# Allegro board D1.brd
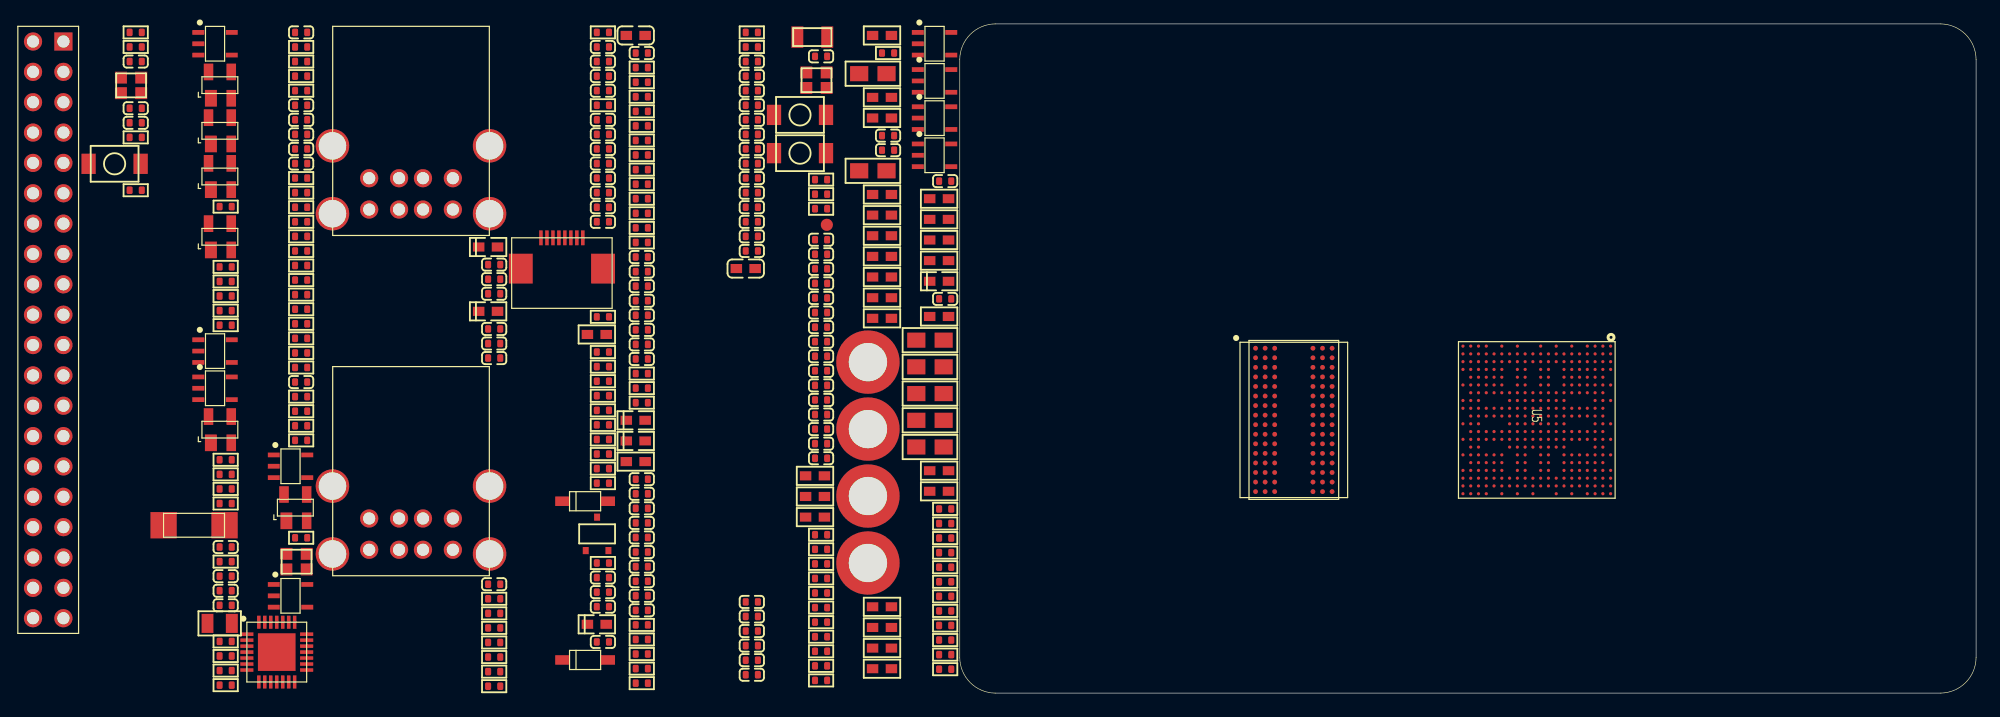
[diagram p0: board, top side]
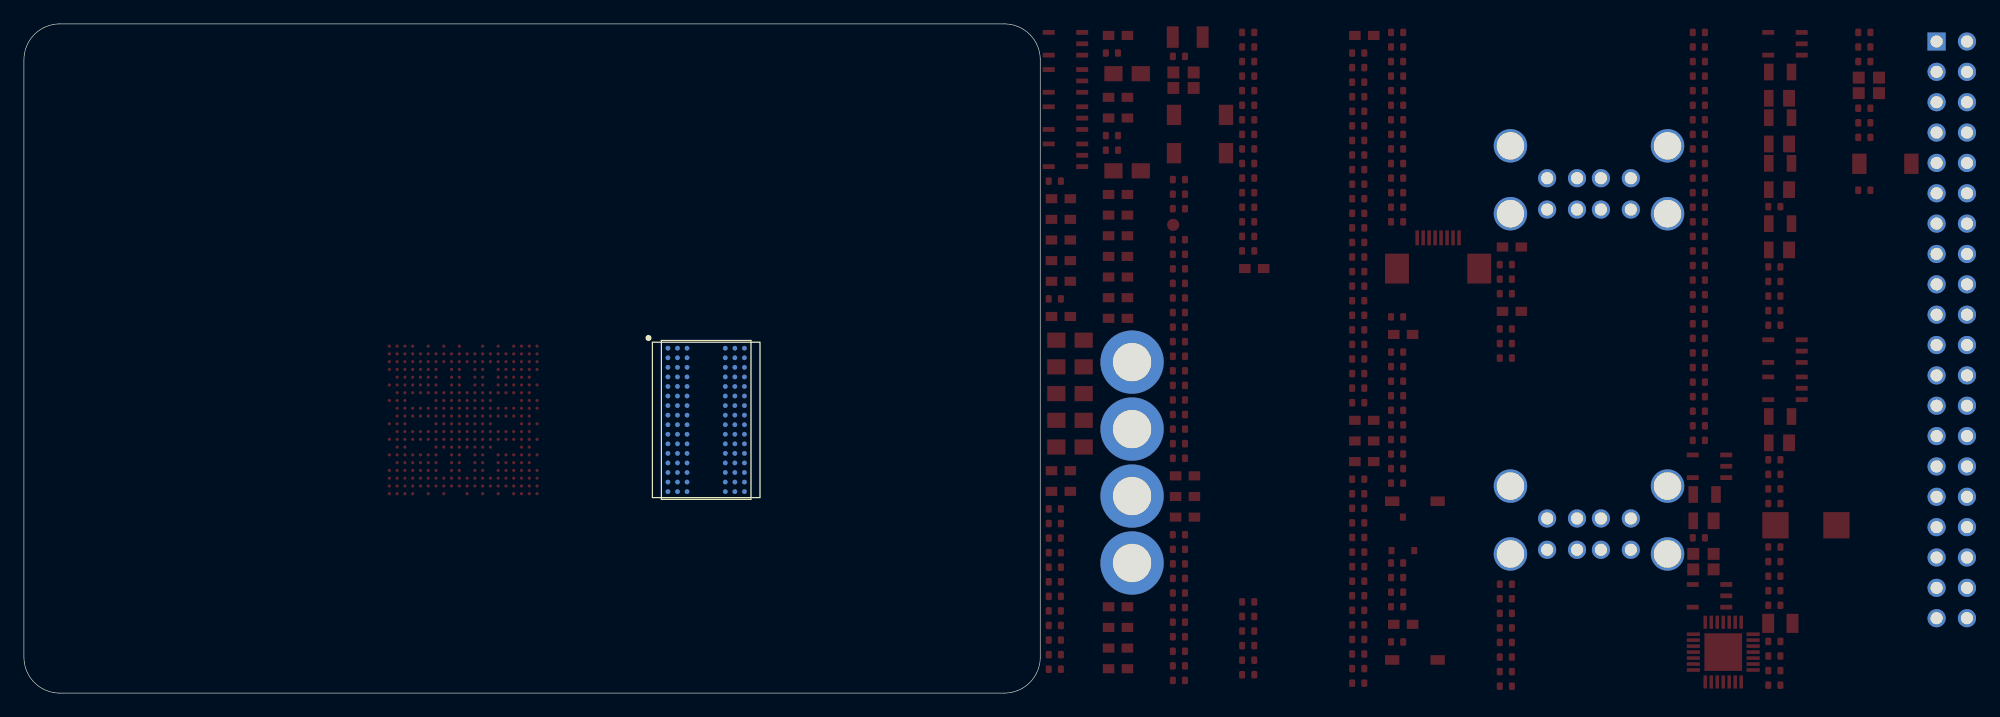
[diagram p1: board, bottom side, seen from below]

Outline 85 x 56 mm; copper layers: TOP, BOTTOM. Coordinates in mm from the lower left corner of the outline.
Outline path: 0,53 0,3 arc(0.88,0.88) 3,0 82,0 arc(84.12,0.88) 85,3 85,53 arc(84.12,55.12) 82,56 3,56 arc(0.88,55.12) 0,53

## Design rules (mm)
constraint set DEFAULT: min track width 0.127

## Placement (name value [footprint] x y rotation side)
C1  10uf  [R0603]  -6.5 31.36 0 top
C2  0.1uf  [C0402]  -5.99 46.65 0 top
C3  22uf  [R0603]  -1.73 37.92 0 top
C4  10uf  [R0603]  -6.5 40 0 top
C5  10uf  [R0603]  -6.5 48.13 0 top
C6  10uf  [R0603]  -6.5 49.85 0 top
C7  0.1uf  [C0402]  -1.22 42.84 0 top
C8  22uf  [R0603]  -1.73 36.19 0 top
C9  10uf  [R0603]  -1.73 31.52 0 top
C10  10uf  [R0603]  -6.5 33.09 0 top
C11  0.1uf  [C0402]  -1.22 32.99 0 top
C12  22uf  [R0603]  -1.73 41.37 0 top
C13  10uf  [R0603]  -6.5 34.82 0 top
C14  10uf  [R0603]  -6.5 36.54 0 top
C15  0.1uf  [C0402]  -5.99 45.43 0 top
C16  22uf  [R0603]  -1.73 39.64 0 top
C17  10uf  [R0603]  -6.5 38.27 0 top
C18  12pf  [C0402]  -11.6 34.28 0 top
C19  12pf  [C0402]  -11.6 35.5 0 top
C20  12pf  [C0402]  -11.6 36.72 0 top
C21  1uf  [C0402]  -11.6 53.28 0 top
C22  12pf  [C0402]  -11.6 37.94 0 top
C23  10uf  [R0603]  -6.5 2.04 0 top
C24  10uf  [R0603]  -6.5 7.22 0 top
C25  1uf  [C0402]  -11.6 26.97 0 top
C26  10uf  [R0603]  -6.5 5.49 0 top
C27  1uf  [C0402]  -11.6 25.75 0 top
C28  1uf  [C0402]  -11.6 24.53 0 top
C29  0.1uf  [C0402]  -11.6 29.41 0 top
C30  10uf  [R0603]  -6.5 3.77 0 top
C31  1uf  [C0402]  -11.6 23.31 0 top
C32  1uf  [C0402]  -11.6 22.09 0 top
C33  1uf  [C0402]  -11.6 20.87 0 top
C34  0.1uf  [C0402]  -11.6 28.19 0 top
C35  1uf  [C0402]  -11.6 19.65 0 top
C36  1uf  [C0402]  -11.6 30.63 0 top
C37  1uf  [C0402]  -11.6 31.85 0 top
C38  1uf  [C0402]  -11.6 33.06 0 top
C39  0.1uf  [C0402]  -17.39 52.85 0 top
C40  0.1uf  [C0402]  -17.39 51.63 0 top
C41  10uf  [R0603]  -12.11 16.45 0 top
C42  1uf  [C0402]  -17.39 7.63 0 top
C43  0.1uf  [C0402]  -17.39 50.41 0 top
C44  0.1uf  [C0402]  -17.39 49.19 0 top
C45  0.1uf  [C0402]  -17.39 47.97 0 top
C46  0.1uf  [C0402]  -17.39 46.75 0 top
C47  0.1uf  [C0402]  -17.39 45.54 0 top
C48  0.1uf  [C0402]  -17.39 44.32 0 top
C49  22uf  [C0603]  -27.1 55.03 0 top
C50  10uf  [R0603]  -12.11 18.18 0 top
C51  1uf  [C0402]  -17.39 6.41 0 top
C52  1uf  [C0402]  -17.39 5.19 0 top
C53  1uf  [C0402]  -17.39 3.97 0 top
C54  0.1uf  [C0402]  -17.39 43.1 0 top
C55  0.1uf  [C0402]  -17.39 41.88 0 top
C56  0.1uf  [C0402]  -17.39 40.66 0 top
C57  22uf  [C0603]  -17.9 35.53 0 top
C58  10uf  [R0603]  -12.11 14.73 0 top
C59  1uf  [C0402]  -17.39 2.76 0 top
C60  1uf  [C0402]  -17.39 1.54 0 top
C61  1uf  [C0402]  -26.59 53.56 0 top
C62  0.1uf  [C0402]  -17.39 39.44 0 top
C63  0.1uf  [C0402]  -17.39 38.22 0 top
C64  0.1uf  [C0402]  -17.39 37 0 top
C65  0.1uf  [C0402]  -26.59 36.49 0 top
C66  0.1uf  [C0402]  -26.59 35.27 0 top
C67  0.1uf  [C0402]  -26.59 34.05 0 top
C68  0.1uf  [C0402]  -26.59 32.84 0 top
C69  0.1uf  [C0402]  -26.59 31.62 0 top
C70  0.1uf  [C0402]  -26.59 30.4 0 top
C71  0.1uf  [C0402]  -26.59 29.18 0 top
C72  0.1uf  [C0402]  -26.59 27.96 0 top
C73  0.1uf  [C0402]  -26.59 17.9 0 top
C74  1uf  [C0402]  -29.85 54.07 0 top
C75  10uf  [R0603]  -27.1 19.37 0 top
C76  1uf  [C0402]  -29.85 52.85 0 top
C77  0.1uf  [C0402]  -26.59 16.68 0 top
C78  0.1uf  [C0402]  -26.59 15.46 0 top
C79  33p  [C0402]  -29.85 50.41 0 top
C80  0.1uf  [C0402]  -26.59 14.24 0 top
C81  0.1uf  [C0402]  -26.59 13.02 0 top
C82  1uf  [C0402]  -29.85 51.63 0 top
C83  0.1uf  [C0402]  -26.59 11.8 0 top
C84  0.1uf  [C0402]  -26.59 10.58 0 top
C85  0.1uf  [C0402]  -26.59 9.37 0 top
C86  0.1uf  [C0402]  -26.59 8.15 0 top
C87  0.1uf  [C0402]  -26.59 6.93 0 top
C88  0.1uf  [C0402]  -29.85 46.75 0 top
C89  1uf  [C0402]  -29.85 45.54 0 top
C90  1uf  [C0402]  -29.85 44.32 0 top
C91  1uf  [C0402]  -29.85 43.1 0 top
C92  0.1uf  [C0402]  -29.85 47.97 0 top
C93  1uf  [C0402]  -29.85 41.88 0 top
C94  1uf  [C0402]  -29.85 40.66 0 top
C95  1uf  [C0402]  -29.85 39.44 0 top
C96  0.1uf  [C0402]  -55.08 26.03 0 top
C97  0.1uf  [C0402]  -55.08 44.32 0 top
C98  18pf  [C0402]  -38.94 29.25 0 top
C99  18pf  [C0402]  -38.94 28.04 0 top
C100  0.1uf  [C0402]  -38.94 30.47 0 top
C101  0.1uf  [C0402]  -55.08 47.97 0 top
C102  0.1uf  [C0402]  -29.85 7.23 0 top
C103  1uf  [C0402]  -38.94 34.64 0 top
C104  0.1uf  [C0402]  -29.85 8.45 0 top
C105  0.1uf  [C0402]  -29.85 4.28 0 top
C106  0.1uf  [C0402]  -29.85 9.67 0 top
C107  0.1uf  [C0402]  -38.94 33.42 0 top
C108  0.1uf  [C0402]  -38.94 9.11 0 top
C109  0.1uf  [C0402]  -55.08 49.19 0 top
C110  0.1uf  [C0402]  -55.08 46.75 0 top
C111  0.1uf  [C0402]  -55.08 55.29 0 top
C112  0.1uf  [C0402]  -38.94 35.86 0 top
C113  0.1uf  [C0402]  -55.08 45.54 0 top
C114  10pf  [C0402]  -61.39 8.57 0 top
C115  10pf  [C0402]  -61.39 9.79 0 top
C116  1uf  [C0402]  -68.92 48.94 0 top
C117  1uf  [C0402]  -68.92 47.72 0 top
C118  1uf  [C0402]  -68.92 52.85 0 top
C119  12pf  [C0402]  -61.39 12.22 0 top
C120  12pf  [C0402]  -61.39 7.35 0 top
D2  LED  [LED0603]  -1.73 34.46 0 top
D3  LED  [LED0603]  -27.1 21.1 0 top
D4  LED  [LED0603]  -27.1 22.83 0 top
D18  DIODE  [SOD-123]  -31.33 16.06 0 top
D25  DIODE  [SOD-123]  -31.33 2.77 0 top
D26  LED  [LED0603]  -39.45 37.33 0 top
D27  LED  [LED0603]  -30.35 5.76 0 top
D28  LED  [LED0603]  -39.45 31.95 0 top
J1  M3  [M3-PAD]  -7.68 10.89 0 top
J2  M3  [M3-PAD]  -7.68 27.7 0 top
J3  M3  [M3-PAD]  -7.68 16.49 0 top
J4  M3  [M3-PAD]  -7.68 22.09 0 top
J5  TP  [TEST-POINT]  -11.12 39.19 0 top
J10  USBA-DUAL  [USBA-DUAL-PAD]  -45.89 11.99 0 top
J11  USBA-DUAL  [USBA-DUAL-PAD]  -45.89 40.47 0 top
J14  HEADER 20X2  [HEADER-20X2]  -77.51 54.53 0 top
L2  1uh  [L0806]  -62.91 5.84 0 top
Q1  WPM3407-3/TR  [SOT-23]  -30.33 13.33 0 top
R1  0  [R0805]  -2.49 29.53 0 top
R2  12k  [R0603]  -6.5 55.03 0 top
R3  0  [R0805]  -2.49 27.3 0 top
R4  10k  [R0402]  -1.22 11.75 0 top
R5  0  [R0805]  -2.49 25.06 0 top
R6  0  [R0805]  -2.49 22.83 0 top
R7  20k  [R0402]  -1.22 4.44 0 top
R8  0  [R0805]  -2.49 20.59 0 top
R9  10k  [R0402]  -1.22 10.54 0 top
R10  0  [R0603]  -6.5 41.73 0 top
R11  0  [R0603]  -1.73 18.61 0 top
R12  10k  [R0402]  -1.22 15.41 0 top
R13  25k  [R0402]  -1.22 9.32 0 top
R14  2k  [R0402]  -1.22 8.1 0 top
R15  20k  [R0402]  -1.22 6.88 0 top
R16  0  [R0805]  -7.26 43.71 0 top
R17  10k  [R0402]  -1.22 14.19 0 top
R18  680k  [R0402]  -1.22 3.22 0 top
R19  150k  [R0402]  -1.22 2 0 top
R20  10k  [R0402]  -1.22 12.97 0 top
R21  74k  [R0402]  -5.99 53.56 0 top
R22  20k  [R0402]  -1.22 5.66 0 top
R23  10k  [R0402]  -11.6 40.53 0 top
R24  10k  [R0402]  -11.6 41.75 0 top
R25  10k  [R0402]  -11.6 42.97 0 top
R26  240  [R0402]  -11.6 7.16 0 top
R27  240  [R0402]  -11.6 3.5 0 top
R28  240  [R0402]  -11.6 9.6 0 top
R29  2k  [R0402]  -17.39 55.29 0 top
R30  2k  [R0402]  -11.6 1.06 0 top
R31  2k  [R0402]  -11.6 2.28 0 top
R32  2k  [R0402]  -17.39 54.07 0 top
R33  2k  [R0402]  -11.6 4.72 0 top
R34  2k  [R0402]  -11.6 5.94 0 top
R35  22  [R0402]  -11.6 8.38 0 top
R36  22  [R0402]  -11.6 12.03 0 top
R37  50  [R0402]  -11.6 10.81 0 top
R38  50  [R0402]  -11.6 13.25 0 top
R39  22  [R0402]  -26.59 52.34 0 top
R40  22  [R0402]  -26.59 26.74 0 top
R41  10k  [R0402]  -26.59 25.52 0 top
R42  1K  [R0402]  -26.59 37.71 0 top
R43  1K  [R0402]  -26.59 38.93 0 top
R44  100K  [R0402]  -26.59 51.12 0 top
R45  100K  [R0402]  -26.59 45.03 0 top
R46  4.7k  [R0402]  -26.59 43.81 0 top
R47  4.7k  [R0402]  -26.59 42.59 0 top
R48  47k  [R0402]  -26.59 46.25 0 top
R49  47k  [R0402]  -26.59 47.47 0 top
R50  47k  [R0402]  -26.59 48.68 0 top
R51  47k  [R0402]  -26.59 49.9 0 top
R52  1K  [R0402]  -26.59 40.15 0 top
R53  1K  [R0402]  -26.59 41.37 0 top
R54  470k  [R0402]  -26.59 24.3 0 top
R55  2k  [R0402]  -26.59 5.71 0 top
R56  1K  [R0402]  -29.85 55.29 0 top
R57  1M  [R0402]  -29.85 49.19 0 top
R58  1K  [R0402]  -26.59 0.83 0 top
R59  100K  [R0402]  -26.59 2.05 0 top
R60  22  [R0402]  -26.59 4.49 0 top
R61  22  [R0402]  -26.59 3.27 0 top
R62  10k  [R0402]  -29.85 18.79 0 top
R63  4.7k  [R0402]  -29.85 10.89 0 top
R64  4.7k  [R0402]  -29.85 21.23 0 top
R65  0  [R0402]  -29.85 27.32 0 top
R66  4.7k  [R0402]  -29.85 20.01 0 top
R67  4.7k  [R0402]  -29.85 17.57 0 top
R68  1K  [R0402]  -29.85 26.1 0 top
R69  100R  [R0402]  -29.85 28.54 0 top
R70  100R  [R0402]  -29.85 22.44 0 top
R71  27K  [R0402]  -29.85 31.49 0 top
R72  10R  [R0603]  -30.35 30.01 0 top
R73  100K  [R0402]  -29.85 23.66 0 top
R74  100K  [R0402]  -29.85 24.88 0 top
R75  0_DNP  [R0402]  -55.08 24.81 0 top
R76  10k  [R0402]  -55.08 43.1 0 top
R77  DNP/4.7k  [R0402]  -38.94 3.02 0 top
R78  47k  [R0402]  -55.08 13 0 top
R79  10k  [R0402]  -55.08 41.88 0 top
R80  15k  [R0402]  -55.08 23.59 0 top
R81  0  [R0402]  -61.39 35.67 0 top
R82  0  [R0402]  -61.39 34.45 0 top
R83  680 1%  [R0402]  -61.39 30.79 0 top
R84  0  [R0402]  -61.39 33.23 0 top
R85  0  [R0402]  -61.39 32.01 0 top
R86  0  [R0402]  -55.08 22.37 0 top
R87  0  [R0402]  -55.08 21.15 0 top
R88  1M  [R0402]  -61.39 40.71 0 top
R89  10k  [R0402]  -55.08 40.66 0 top
R90  10k  [R0402]  -55.08 39.44 0 top
R91  10k  [R0402]  -55.08 38.22 0 top
R92  10k  [R0402]  -55.08 37 0 top
R93  10k  [R0402]  -55.08 35.78 0 top
R94  10k  [R0402]  -55.08 34.56 0 top
R95  10k  [R0402]  -55.08 33.34 0 top
R96  0_DNP  [R0402]  -55.08 54.07 0 top
R97  0_DNP  [R0402]  -55.08 52.85 0 top
R98  10k  [R0402]  -55.08 32.12 0 top
R99  10k  [R0402]  -55.08 30.9 0 top
R100  DNP/4.7k  [R0402]  -38.94 7.89 0 top
R101  DNP/4.7k  [R0402]  -38.94 6.67 0 top
R102  0_DNP  [R0402]  -38.94 1.8 0 top
R103  0_DNP  [R0402]  -38.94 0.58 0 top
R104  10k  [R0402]  -55.08 51.63 0 top
R105  10k  [R0402]  -55.08 50.41 0 top
R106  DNP/4.7k  [R0402]  -38.94 5.46 0 top
R107  DNP/4.7k  [R0402]  -38.94 4.24 0 top
R108  1K  [R0402]  -55.08 29.69 0 top
R109  1K  [R0402]  -55.08 28.47 0 top
R110  1K  [R0402]  -55.08 27.25 0 top
R111  47k  [R0402]  -61.39 15.87 0 top
R112  47k  [R0402]  -68.92 54.07 0 top
R113  47k  [R0402]  -61.39 18.3 0 top
R114  47k  [R0402]  -61.39 17.09 0 top
R115  47k  [R0402]  -68.92 55.29 0 top
R116  47k  [R0402]  -61.39 0.67 0 top
R117  10k  [R0402]  -61.39 4.32 0 top
R118  10k  [R0402]  -61.39 3.1 0 top
R119  10k  [R0402]  -61.39 1.89 0 top
R120  10k  [R0402]  -61.39 11 0 top
R121  10k  [R0402]  -61.39 19.52 0 top
R122  51k  [R0402]  -68.92 42.08 0 top
R123  6.8k  [R0402]  -68.92 46.5 0 top
R124  0  [R0603]  -1.73 16.89 0 top
R125  0  [R0805]  -7.26 51.83 0 top
RF1  AN2051-245  [ANT-2051]  -64.04 14.05 0 top
SW1  FEL  [BUTTON-3X4]  -13.36 45.18 0 top
SW2  RESET  [BUTTON-3X4]  -13.36 48.39 0 top
SW4  SW PUSHBUTTON  [BUTTON-3X4]  -70.68 44.29 0 top
U1  SY8089  [SOT23-5-0P95-2P8-1P6X2P9MM]  -2.11 51.23 0 top
U2  SY8089  [SOT23-5-0P95-2P8-1P6X2P9MM]  -2.11 45.01 0 top
U3  SY8089  [SOT23-5-0P95-2P8-1P6X2P9MM]  -2.11 48.12 0 top
U4  SY8089  [SOT23-5-0P95-2P8-1P6X2P9MM]  -2.11 54.34 0 top
U5  D1-BGA337-0518  [BGA337P65B1300_1300H125]  48.26 22.86 270 top
U6  K4B4G1646E  [DDR3-BGA96]  27.94 22.86 0 top
U7  K4B4G1646E  [DDR3-BGA96]  27.94 22.86 180 bottom
U11  TFT-0P96-160X80-8P  [FPC8-0P5MM]  -33.27 38.1 0 top
U12  -  [SP0503BAHTG]  -61.88 38.19 0 top
U13  LPW5206  [SOT23-5-0P95-2P8-1P6X2P9MM]  -55.97 18.98 0 top
U14  GL850G  [QFN28-0P5-5X5MM]  -57.12 3.43 0 top
U15  LPW5206  [SOT23-5-0P95-2P8-1P6X2P9MM]  -55.97 8.14 0 top
U16  -  [SP0503BAHTG]  -61.88 22.05 0 top
U17  -  [SP0503BAHTG]  -61.88 43.23 0 top
U18  LPW5206  [SOT23-5-0P95-2P8-1P6X2P9MM]  -62.28 28.62 0 top
U19  -  [SP0503BAHTG]  -61.88 47.05 0 top
U20  LPW5206  [SOT23-5-0P95-2P8-1P6X2P9MM]  -62.28 25.51 0 top
U21  LPW5206  [SOT23-5-0P95-2P8-1P6X2P9MM]  -62.28 54.34 0 top
U22  -  [SP0503BAHTG]  -61.88 50.88 0 top
U24  -  [SP0503BAHTG]  -55.57 15.52 0 top
X1  24M  [CRYSTAL-2520]  -11.98 51.29 0 top
X2  12M  [CRYSTAL-2520]  -55.47 11 0 top
X3  26M  [CRYSTAL-2520]  -69.3 50.85 0 top
Y1  32.768k  [CRYSTAL-3215]  -12.33 54.9 0 top

## Library data of the parts
C1-C120 = CAP NP
D2-D4 D26-D28 = LED
D18 D25 = DIODE
J1-J5 = HEADER 1
J10 J11 = USBA-DUAL
J14 = HEADER 20X2
L2 = INDUCTOR
Q1 = MOSFET P
R1-R125 = R
RF1 = ANT-2PORT
SW1 SW2 SW4 = SW PUSHBUTTON
U1-U4 = SY8089
U5 = D1-BGA337-0518
U6 U7 = K4B4G1646E
U11 = TFT-0P96-160X80-8P
U12 U16 U17 U19 U22 U24 = SP0503BAHTG
U13 U15 U18 U20 U21 = LPW5206
U14 = GL850G
X1-X3 = XTAL-4
Y1 = XTAL

## Footprints (pads in the part's own frame, mm; a bottom-side part is the same pattern mirrored in y, then rotated)
ANT-2051
  rect 2.2x2.2 smd: 1(2.55,0) 2(-2.55,0)
BGA337P65B1300_1300H125
  round 0.27 smd: A1(-6.175,6.175) A2(-5.525,6.175) A3(-4.875,6.175) A4(-4.225,6.175) A6(-2.925,6.175) A8(-1.625,6.175) A11(0.325,6.175) A13(1.625,6.175) A15(2.925,6.175) A17(4.225,6.175) A18(4.875,6.175) A19(5.525,6.175) A20(6.175,6.175) B1(-6.175,5.525) B2(-5.525,5.525) B3(-4.875,5.525) B4(-4.225,5.525) B5(-3.575,5.525) B6(-2.925,5.525) B7(-2.275,5.525) B8(-1.625,5.525) B9(-0.975,5.525) B10(-0.325,5.525) B11(0.325,5.525) B12(0.975,5.525) B13(1.625,5.525) B14(2.275,5.525) B15(2.925,5.525) B16(3.575,5.525) B17(4.225,5.525) B18(4.875,5.525) B19(5.525,5.525) B20(6.175,5.525) C1(-6.175,4.875) C2(-5.525,4.875) C3(-4.875,4.875) C4(-4.225,4.875) C5(-3.575,4.875) C6(-2.925,4.875) C7(-2.275,4.875) C8(-1.625,4.875) C9(-0.975,4.875) C10(-0.325,4.875) C11(0.325,4.875) C12(0.975,4.875) C13(1.625,4.875) C14(2.275,4.875) C15(2.925,4.875) C16(3.575,4.875) C17(4.225,4.875) C18(4.875,4.875) C19(5.525,4.875) C20(6.175,4.875) D1(-6.175,4.225) D2(-5.525,4.225) D3(-4.875,4.225) D4(-4.225,4.225) D5(-3.575,4.225) D6(-2.925,4.225) D7(-2.275,4.225) D9(-0.975,4.225) D10(-0.325,4.225) D12(0.975,4.225) D13(1.625,4.225) D15(2.925,4.225) D16(3.575,4.225) D17(4.225,4.225) D18(4.875,4.225) D19(5.525,4.225) D20(6.175,4.225) E2(-5.525,3.575) E3(-4.875,3.575) E4(-4.225,3.575) E5(-3.575,3.575) E6(-2.925,3.575) E7(-2.275,3.575) E9(-0.975,3.575) E10(-0.325,3.575) E12(0.975,3.575) E13(1.625,3.575) E15(2.925,3.575) E16(3.575,3.575) E17(4.225,3.575) E18(4.875,3.575) E19(5.525,3.575) F1(-6.175,2.925) F2(-5.525,2.925) F3(-4.875,2.925) F4(-4.225,2.925) F5(-3.575,2.925) F6(-2.925,2.925) F7(-2.275,2.925) F9(-0.975,2.925) F10(-0.325,2.925) F12(0.975,2.925) F13(1.625,2.925) F15(2.925,2.925) F16(3.575,2.925) F17(4.225,2.925) F18(4.875,2.925) F19(5.525,2.925) F20(6.175,2.925) G2(-5.525,2.275) G3(-4.875,2.275) G4(-4.225,2.275) G5(-3.575,2.275) G6(-2.925,2.275) G7(-2.275,2.275) G8(-1.625,2.275) G9(-0.975,2.275) G10(-0.325,2.275) G11(0.325,2.275) G12(0.975,2.275) G13(1.625,2.275) G14(2.275,2.275) G15(2.925,2.275) G16(3.575,2.275) G17(4.225,2.275) G18(4.875,2.275) G19(5.525,2.275) H1(-6.175,1.625) H2(-5.525,1.625) H3(-4.875,1.625) H7(-2.275,1.625) H8(-1.625,1.625) H9(-0.975,1.625) H10(-0.325,1.625) H11(0.325,1.625) H12(0.975,1.625) H13(1.625,1.625) H14(2.275,1.625) H18(4.875,1.625) H19(5.525,1.625) H20(6.175,1.625) J2(-5.525,0.975) J3(-4.875,0.975) J4(-4.225,0.975) J5(-3.575,0.975) J6(-2.925,0.975) J7(-2.275,0.975) J8(-1.625,0.975) J9(-0.975,0.975) J10(-0.325,0.975) J11(0.325,0.975) J12(0.975,0.975) J13(1.625,0.975) J14(2.275,0.975) J15(2.925,0.975) J16(3.575,0.975) J17(4.225,0.975) J18(4.875,0.975) J19(5.525,0.975) K1(-6.175,0.325) K2(-5.525,0.325) K3(-4.875,0.325) K4(-4.225,0.325) K5(-3.575,0.325) K6(-2.925,0.325) K7(-2.275,0.325) K8(-1.625,0.325) K9(-0.975,0.325) K10(-0.325,0.325) K11(0.325,0.325) K12(0.975,0.325) K13(1.625,0.325) K14(2.275,0.325) K15(2.925,0.325) K16(3.575,0.325) K17(4.225,0.325) K18(4.875,0.325) K19(5.525,0.325) L2(-5.525,-0.325) L3(-4.875,-0.325) L7(-2.275,-0.325) L8(-1.625,-0.325) L9(-0.975,-0.325) L10(-0.325,-0.325) L11(0.325,-0.325) L12(0.975,-0.325) L13(1.625,-0.325) L14(2.275,-0.325) L18(4.875,-0.325) L19(5.525,-0.325) L20(6.175,-0.325) M2(-5.525,-0.975) M3(-4.875,-0.975) M4(-4.225,-0.975) M5(-3.575,-0.975) M6(-2.925,-0.975) M7(-2.275,-0.975) M8(-1.625,-0.975) M9(-0.975,-0.975) M10(-0.325,-0.975) M11(0.325,-0.975) M12(0.975,-0.975) M13(1.625,-0.975) M14(2.275,-0.975) M15(2.925,-0.975) M16(3.575,-0.975) M17(4.225,-0.975) M18(4.875,-0.975) M19(5.525,-0.975) N1(-6.175,-1.625) N2(-5.525,-1.625) N3(-4.875,-1.625) N4(-4.225,-1.625) N5(-3.575,-1.625) N6(-2.925,-1.625) N7(-2.275,-1.625) N8(-1.625,-1.625) N9(-0.975,-1.625) N10(-0.325,-1.625) N11(0.325,-1.625) N12(0.975,-1.625) N13(1.625,-1.625) N14(2.275,-1.625) N15(2.925,-1.625) N16(3.575,-1.625) N17(4.225,-1.625) N18(4.875,-1.625) N19(5.525,-1.625) N20(6.175,-1.625) P2(-5.525,-2.275) P3(-4.875,-2.275) P7(-2.275,-2.275) P8(-1.625,-2.275) P9(-0.975,-2.275) P10(-0.325,-2.275) P11(0.325,-2.275) P12(0.975,-2.275) P13(1.625,-2.275) P14(2.275,-2.275) P18(4.875,-2.275) P19(5.525,-2.275) R1(-6.175,-2.925) R2(-5.525,-2.925) R3(-4.875,-2.925) R4(-4.225,-2.925) R5(-3.575,-2.925) R6(-2.925,-2.925) R7(-2.275,-2.925) R9(-0.975,-2.925) R10(-0.325,-2.925) R12(0.975,-2.925) R13(1.625,-2.925) R15(2.925,-2.925) R16(3.575,-2.925) R17(4.225,-2.925) R18(4.875,-2.925) R19(5.525,-2.925) R20(6.175,-2.925) T2(-5.525,-3.575) T3(-4.875,-3.575) T4(-4.225,-3.575) T5(-3.575,-3.575) T6(-2.925,-3.575) T7(-2.275,-3.575) T9(-0.975,-3.575) T10(-0.325,-3.575) T12(0.975,-3.575) T13(1.625,-3.575) T15(2.925,-3.575) T16(3.575,-3.575) T17(4.225,-3.575) T18(4.875,-3.575) T19(5.525,-3.575) U1(-6.175,-4.225) U2(-5.525,-4.225) U3(-4.875,-4.225) U4(-4.225,-4.225) U5(-3.575,-4.225) U6(-2.925,-4.225) U7(-2.275,-4.225) U9(-0.975,-4.225) U10(-0.325,-4.225) U12(0.975,-4.225) U13(1.625,-4.225) U15(2.925,-4.225) U16(3.575,-4.225) U17(4.225,-4.225) U18(4.875,-4.225) U19(5.525,-4.225) U20(6.175,-4.225) V1(-6.175,-4.875) V2(-5.525,-4.875) V3(-4.875,-4.875) V4(-4.225,-4.875) V5(-3.575,-4.875) V6(-2.925,-4.875) V7(-2.275,-4.875) V8(-1.625,-4.875) V9(-0.975,-4.875) V10(-0.325,-4.875) V11(0.325,-4.875) V12(0.975,-4.875) V13(1.625,-4.875) V14(2.275,-4.875) V15(2.925,-4.875) V16(3.575,-4.875) V17(4.225,-4.875) V18(4.875,-4.875) V19(5.525,-4.875) V20(6.175,-4.875) W1(-6.175,-5.525) W2(-5.525,-5.525) W3(-4.875,-5.525) W4(-4.225,-5.525) W5(-3.575,-5.525) W6(-2.925,-5.525) W7(-2.275,-5.525) W8(-1.625,-5.525) W9(-0.975,-5.525) W10(-0.325,-5.525) W11(0.325,-5.525) W12(0.975,-5.525) W13(1.625,-5.525) W14(2.275,-5.525) W15(2.925,-5.525) W16(3.575,-5.525) W17(4.225,-5.525) W18(4.875,-5.525) W19(5.525,-5.525) W20(6.175,-5.525) Y1(-6.175,-6.175) Y2(-5.525,-6.175) Y3(-4.875,-6.175) Y4(-4.225,-6.175) Y6(-2.925,-6.175) Y8(-1.625,-6.175) Y9(-0.975,-6.175) Y11(0.325,-6.175) Y13(1.625,-6.175) Y15(2.925,-6.175) Y17(4.225,-6.175) Y18(4.875,-6.175) Y19(5.525,-6.175) Y20(6.175,-6.175)
BUTTON-3X4
  rect 1.2x1.7 smd: 1(-2.175,0) 2(2.175,0)
C0402
  rrect 0.508x0.635 smd: 1(-0.508,0) 2(0.508,0)
C0603
  rect 0.965x0.762 smd: 1(-0.787,0) 2(0.787,0)
CRYSTAL-2520
  rect 1x1 smd: 1(-0.85,-0.65) 2(0.85,-0.65) 3(0.85,0.65) 4(-0.85,0.65)
CRYSTAL-3215
  rect 1x1.8 smd: 1(-1.25,0) 2(1.25,0)
DDR3-BGA96
  round 0.4 smd: A1(-3.2,6) A2(-2.4,6) A3(-1.6,6) A7(1.6,6) A8(2.4,6) A9(3.2,6) B1(-3.2,5.2) B2(-2.4,5.2) B3(-1.6,5.2) B7(1.6,5.2) B8(2.4,5.2) B9(3.2,5.2) C1(-3.2,4.4) C2(-2.4,4.4) C3(-1.6,4.4) C7(1.6,4.4) C8(2.4,4.4) C9(3.2,4.4) D1(-3.2,3.6) D2(-2.4,3.6) D3(-1.6,3.6) D7(1.6,3.6) D8(2.4,3.6) D9(3.2,3.6) E1(-3.2,2.8) E2(-2.4,2.8) E3(-1.6,2.8) E7(1.6,2.8) E8(2.4,2.8) E9(3.2,2.8) F1(-3.2,2) F2(-2.4,2) F3(-1.6,2) F7(1.6,2) F8(2.4,2) F9(3.2,2) G1(-3.2,1.2) G2(-2.4,1.2) G3(-1.6,1.2) G7(1.6,1.2) G8(2.4,1.2) G9(3.2,1.2) H1(-3.2,0.4) H2(-2.4,0.4) H3(-1.6,0.4) H7(1.6,0.4) H8(2.4,0.4) H9(3.2,0.4) J1(-3.2,-0.4) J2(-2.4,-0.4) J3(-1.6,-0.4) J7(1.6,-0.4) J8(2.4,-0.4) J9(3.2,-0.4) K1(-3.2,-1.2) K2(-2.4,-1.2) K3(-1.6,-1.2) K7(1.6,-1.2) K8(2.4,-1.2) K9(3.2,-1.2) L1(-3.2,-2) L2(-2.4,-2) L3(-1.6,-2) L7(1.6,-2) L8(2.4,-2) L9(3.2,-2) M1(-3.2,-2.8) M2(-2.4,-2.8) M3(-1.6,-2.8) M7(1.6,-2.8) M8(2.4,-2.8) M9(3.2,-2.8) N1(-3.2,-3.6) N2(-2.4,-3.6) N3(-1.6,-3.6) N7(1.6,-3.6) N8(2.4,-3.6) N9(3.2,-3.6) P1(-3.2,-4.4) P2(-2.4,-4.4) P3(-1.6,-4.4) P7(1.6,-4.4) P8(2.4,-4.4) P9(3.2,-4.4) R1(-3.2,-5.2) R2(-2.4,-5.2) R3(-1.6,-5.2) R7(1.6,-5.2) R8(2.4,-5.2) R9(3.2,-5.2) T1(-3.2,-6) T2(-2.4,-6) T3(-1.6,-6) T7(1.6,-6) T8(2.4,-6) T9(3.2,-6)
FPC8-0P5MM
  rect 2x2.5 smd: (-3.44,-2.575) (3.44,-2.575)
  rect 0.3x1.25 smd: 1(-1.75,0) 2(-1.25,0) 3(-0.75,0) 4(-0.25,0) 5(0.25,0) 6(0.75,0) 7(1.25,0) 8(1.75,0)
HEADER-20X2
  rect 1.524x1.524 hole 1.016: 1(2.54,0)
  round 1.524 hole 1.016: 2(0,0) 3(2.54,-2.54) 4(0,-2.54) 5(2.54,-5.08) 6(0,-5.08) 7(2.54,-7.62) 8(0,-7.62) 9(2.54,-10.16) 10(0,-10.16) 11(2.54,-12.7) 12(0,-12.7) 13(2.54,-15.24) 14(0,-15.24) 15(2.54,-17.78) 16(0,-17.78) 17(2.54,-20.32) 18(0,-20.32) 19(2.54,-22.86) 20(0,-22.86) 21(2.54,-25.4) 22(0,-25.4) 23(2.54,-27.94) 24(0,-27.94) 25(2.54,-30.48) 26(0,-30.48) 27(2.54,-33.02) 28(0,-33.02) 29(2.54,-35.56) 30(0,-35.56) 31(2.54,-38.1) 32(0,-38.1) 33(2.54,-40.64) 34(0,-40.64) 35(2.54,-43.18) 36(0,-43.18) 37(2.54,-45.72) 38(0,-45.72) 39(2.54,-48.26) 40(0,-48.26)
L0806
  rect 1x1.6 smd: 1(0,0) 2(2.032,0)
LED0603
  rect 0.965x0.762 smd: 1(-0.787,0) 2(0.787,0)
M3-PAD
  round 5.3 hole 3.2: 1(0,0)
QFN28-0P5-5X5MM
  rect 1.1x0.3 smd: 1(-2.5,1.5) 2(-2.5,1) 3(-2.5,0.5) 4(-2.5,0) 5(-2.5,-0.5) 6(-2.5,-1) 7(-2.5,-1.5) 15(2.5,-1.5) 16(2.5,-1) 17(2.5,-0.5) 18(2.5,0) 19(2.5,0.5) 20(2.5,1) 21(2.5,1.5)
  rect 0.3x1.1 smd: 8(-1.5,-2.5) 9(-1,-2.5) 10(-0.5,-2.5) 11(0,-2.5) 12(0.5,-2.5) 13(1,-2.5) 14(1.5,-2.5) 22(1.5,2.5) 23(1,2.5) 24(0.5,2.5) 25(0,2.5) 26(-0.5,2.5) 27(-1,2.5) 28(-1.5,2.5)
  rect 3.15x3.15 smd: 29(0,0)
R0402
  rrect 0.508x0.635 smd: 1(-0.508,0) 2(0.508,0)
R0603
  rect 0.965x0.762 smd: 1(-0.787,0) 2(0.787,0)
R0805
  rect 1.524x1.27 smd: 1(-1.143,0) 2(1.143,0)
SOD-123
  rect 1.2x0.8 smd: 1(-1.9,0) 2(1.9,0)
SOT23-5-0P95-2P8-1P6X2P9MM
  rect 1x0.4 smd: 1(-1.4,0.95) 2(-1.4,0) 3(-1.4,-0.95) 4(1.4,-0.95) 5(1.4,0.95)
SOT-23
  rect 0.5x0.6 smd: 1(-0.95,-1.4) 2(0.95,-1.4) 3(0,1.4)
SP0503BAHTG
  rect 1x1.4 smd: 1(-0.75,-1.1)
  rect 0.8x1.4 smd: 2(0.95,-1.1) 3(0.95,1.1) 4(-0.95,1.1)
TEST-POINT
  round 1.016 smd: 1(0,0)
USBA-DUAL-PAD
  round 1.524 hole 1.016: 1(3.5,0) 2(1,0) 3(-1,0) 4(-3.5,0) 5(3.5,2.62) 6(1,2.62) 7(-1,2.62) 8(-3.5,2.62)
  round 2.8 hole 2.3: 9(-6.57,5.33) 10(6.57,5.33) 11(-6.57,-0.35) 12(6.57,-0.35)

## Nets
GND: C1.2 C3.2 C4.2 C5.2 C6.2 C8.2 C9.2 C10.2 C12.2 C13.2 C14.2 C16.2 C17.2 C18.1 C19.1 C20.1 C21.2 C22.1 C23.2 C24.2 C25.2 C26.2 C27.2 C28.2 C29.2 C30.2 C31.2 C32.2 C33.2 C34.2 C35.2 C36.2 C37.2 C38.2 C39.2 C41.2 C42.2 C43.2 C45.2 C46.2 C47.2 C48.2 C49.2 C50.2 C51.2 C52.2 C53.2 C54.2 C55.2 C56.2 C57.2 C58.2 C59.2 C60.2 C61.2 C62.2 C63.2 C64.2 C65.2 C66.2 C67.2 C68.2 C69.2 C70.2 C71.2 C72.2 C73.1 C74.1 C75.1 C76.1 C77.2 C79.2 C80.2 C81.1 C82.1 C83.2 C88.2 C89.2 C90.2 C91.2 C92.2 C93.2 C94.2 C95.2 C96.1 C97.1 C98.1 C99.1 C100.1 C101.1 C102.1 C103.1 C104.1 C105.1 C106.1 C107.1 C108.1 C109.1 C110.1 C111.1 C112.1 C113.1 C114.1 C115.1 C116.1 C117.1 C118.1 C119.2 C120.2 J1.1 J2.1 J3.1 J4.1 J10.4 J10.8 J10.9 J10.10 J10.11 J10.12 J11.4 J11.8 J11.9 J11.10 J11.11 J11.12 J14.2 J14.12 J14.22 J14.28 J14.39 R7.2 R9.2 R14.2 R15.2 R19.2 R22.2 R26.1 R27.1 R28.2 R32.2 R33.2 R34.2 R44.2 R45.2 R52.2 R53.2 R54.2 R59.2 R60.2 R61.2 R74.2 R77.2 R79.1 R80.2 R83.1 R95.2 R100.2 R101.2 R106.2 R107.2 R110.2 R111.2 R123.2 SW1.2 SW2.2 U1.2 U2.2 U3.2 U4.2 U5.A1 U5.A2 U5.A15 U5.A19 U5.A20 U5.B1 U5.B10 U5.B20 U5.C4 U5.C8 U5.C10 U5.D18 U5.E5 U5.F3 U5.F9 U5.F12 U5.F18 U5.G10 U5.G11 U5.G12 U5.H1 U5.H2 U5.H10 U5.H11 U5.H12 U5.H18 U5.J3 U5.J6 U5.J7 U5.J8 U5.J9 U5.J10 U5.J11 U5.J12 U5.K3 U5.K6 U5.K7 U5.K8 U5.K9 U5.K10 U5.K11 U5.K12 U5.K13 U5.K14 U5.L8 U5.L9 U5.L10 U5.L11 U5.L12 U5.L13 U5.L14 U5.L18 U5.M3 U5.M5 U5.M8 U5.M9 U5.M10 U5.M11 U5.M12 U5.M13 U5.M14 U5.N11 U5.N12 U5.N13 U5.N14 U5.N15 U5.N18 U5.P7 U5.P11 U5.P12 U5.P13 U5.R10 U5.R18 U5.T5 U5.T7 U5.T13 U5.V2 U5.V3 U5.V4 U5.V6 U5.V9 U5.V12 U5.V15 U5.V17 U5.W1 U5.W17 U5.W20 U5.Y1 U5.Y2 U5.Y19 U5.Y20 U6.A9 U6.B1 U6.B3 U6.B9 U6.D1 U6.D8 U6.E1 U6.E2 U6.E8 U6.F9 U6.G1 U6.G8 U6.G9 U6.J2 U6.J8 U6.M1 U6.M9 U6.P1 U6.P9 U6.T1 U6.T9 U7.A9 U7.B1 U7.B3 U7.B9 U7.D1 U7.D8 U7.E1 U7.E2 U7.E8 U7.F9 U7.G1 U7.G8 U7.G9 U7.J2 U7.J8 U7.M1 U7.M9 U7.P1 U7.P9 U7.T1 U7.T9 U11.2 U12.1 U13.2 U14.29 U15.2 U16.1 U17.1 U18.2 U19.1 U20.2 U21.2 U22.1 U24.1 X1.2 X1.4 X2.2 X2.4 X3.2 X3.4
V3: C113.2
VBUS_5VIN: C112.2 J14.1 J14.3 R8.1 R125.1 U24.2
VCC_0V9_2A: C2.1 C3.1 C4.1 R1.1 R2.1 U1.3
VCC_1V8: C32.1 C35.1 C36.1 C37.1 C39.1 C70.1 C92.1 R16.2 R23.1 U5.J4 U5.J5 U5.K4 U5.K5 U5.M17 U5.P14 U5.R16
VCC_1V35_2A: C7.1 C8.1 C9.1 R3.1 R13.1 U2.3
VCC_2V8_2A: C15.1 C16.1 C17.1 R6.1 R10.1 R21.1 R124.1 U4.3
VCC_3V3: C38.1 C65.1 C66.1 C67.1 C69.1 C71.1 C72.1 C73.2 C81.2 C95.1 C116.2 C117.2 D26.2 D27.2 Q1.2(SOURCE) R5.2 R11.1 R24.1 R25.1 R41.2 R42.2 R43.2 R46.2 R47.2 R48.1 R49.1 R50.1 R51.1 R71.1 R73.1 R78.1 R112.1 R113.1 R114.1 R115.1 R116.1 R117.1 R118.1 R119.1 R120.1 R121.1 U5.C20 U5.D12 U5.E4 U5.F4(VCC-PF) U5.G4 U5.G17 U5.T16 U11.7(VDD)
VCC_3V3_2A: C11.1 C12.1 C13.1 D2.2 J14.5 J14.7 R4.1 R5.1 R18.1 U3.3
VCC_5V_IN: C1.1 C6.1 C10.1 C14.1 C68.1 C93.1 C96.2 C104.2 C106.2 C108.2 C110.2 R8.2 R12.1 R17.1 R20.1 R66.2 R67.2 R75.1 R93.2 R96.1 R97.1 R98.1 R99.1 R102.1 R103.1 R104.1 R105.1 R125.2 U1.4(VIN) U2.4(VIN) U3.4(VIN) U4.4(VIN) U13.5 U14.27 U15.5 U18.5 U20.5 U21.5
VCC_CPU: C26.1 C27.1 C28.1 C29.1 C30.1 C31.1 C33.1 C34.1 R1.2 U5.G7 U5.G8 U5.G9 U5.G13 U5.G14 U5.H7 U5.H8 U5.H9 U5.H13 U5.H14 U5.J13 U5.J14
VCC_DDR: C40.1 C41.1 C42.1 C43.1 C44.1 C49.1 C50.1 C51.1 C52.1 C53.1 C54.1 C55.1 C56.1 C57.1 C58.1 C59.1 C60.1 C61.1 C62.1 C63.1 C64.1 C90.1 R3.2 R29.1 R30.1 R31.1 U5.N8 U5.N9 U5.N10 U5.P8 U5.P9 U5.P10 U6.A1 U6.A8 U6.B2 U6.C1 U6.C9 U6.D2 U6.D9 U6.E9 U6.F1 U6.G7 U6.H2 U6.H9 U6.K2 U6.K8 U6.N1 U6.N9 U6.R1 U6.R9 U7.A1 U7.A8 U7.B2 U7.C1 U7.C9 U7.D2 U7.D9 U7.E9 U7.F1 U7.G7 U7.H2 U7.H9 U7.K2 U7.K8 U7.N1 U7.N9 U7.R1 U7.R9
VCC_LDO_IN: C25.1 R6.2 U5.M7
VCC_PE: C88.1 R10.2 R11.2 R63.2 R64.2 R65.2 U5.M4
ALDO: C74.2 R57.1 R122.1 U5.C18 U5.C19
BL_PWM: R74.1 U5.M19
BT_HOST_WAKE: R117.2 U5.E7
BT_RST_N: R120.2 U5.D7
BT_WAKE: R118.2 U5.F7
CMOS_AVDD: C91.1 R124.2
CMOS_D0: U5.T2
CMOS_D1: U5.T3
CMOS_D2: U5.R1
CMOS_D3: U5.R2
CMOS_D4: U5.R3
CMOS_D5: U5.P2
CMOS_D6: U5.P3
CMOS_D7: U5.N1
CMOS_DOVDD: C89.1 R62.2 R65.1
CMOS_HS: U5.V1
CMOS_I2C_SCK: R63.1 U5.R5
CMOS_I2C_SDA: R64.1 U5.R4
CMOS_MCLK: U5.U3
CMOS_PCLK: U5.U2
CMOS_PWDN: U5.N5
CMOS_RESET: R62.1 U5.N4
CMOS_VS: U5.U1
DDR_A0: U5.V11 U6.N3 U7.N3
DDR_A1: U5.W13 U6.P7 U7.P7
DDR_A2: U5.V13 U6.P3 U7.P3
DDR_A3: U5.V14 U6.N2 U7.N2
DDR_A4: U5.T15 U6.P8 U7.P8
DDR_A5: U5.R15 U6.P2 U7.P2
DDR_A6: U5.U13 U6.R8 U7.R8
DDR_A7: U5.W15 U6.R2 U7.R2
DDR_A8: U5.U15 U6.T8 U7.T8
DDR_A9: U5.V16 U6.R3 U7.R3
DDR_A10: U5.R9 U6.L7 U7.L7
DDR_A11: U5.Y13 U6.R7 U7.R7
DDR_A12: U5.W12 U6.N7 U7.N7
DDR_A13: U5.Y15 U6.T3 U7.T3
DDR_A14: U5.W16 U6.T7 U7.T7
DDR_A15: U5.Y11
DDR_BA0: U5.W11 U6.M2 U7.M2
DDR_BA1: U5.W14 U6.N8 U7.N8
DDR_BA2: U5.V10 U6.M3 U7.M3
DDR_CAS_B: U5.T9 U6.K3 U7.K3
DDR_CK_N: R36.1 R38.1 U5.U10
DDR_CK_P: R35.1 R37.1 U5.T10
DDR_CK_R_N: R36.2 U6.K7 U7.K7
DDR_CK_R_P: R35.2 U6.J7 U7.J7
DDR_CKE0: U5.W9 U6.K9
DDR_CKE1: U5.Y9 U7.K9
DDR_CS0_B: U5.R12 U6.L2
DDR_CS1_B: U5.R13 U7.L2
DDR_D0: U5.W7 U6.E3 U7.E3
DDR_D1: U5.V7 U6.F7 U7.F7
DDR_D2: U5.W8 U6.F2 U7.F2
DDR_D3: U5.V8 U6.F8 U7.F8
DDR_D4: U5.W4 U6.H3 U7.H3
DDR_D5: U5.Y4 U6.H8 U7.H8
DDR_D6: U5.V5 U6.G2 U7.G2
DDR_D7: U5.W5 U6.H7 U7.H7
DDR_D8: U5.U4 U6.D7 U7.D7
DDR_D9: U5.U7 U6.C3 U7.C3
DDR_D10: U5.U5 U6.C8 U7.C8
DDR_D11: U5.T6 U6.C2 U7.C2
DDR_D12: U5.U6 U6.A7 U7.A7
DDR_D13: U5.R7 U6.A2 U7.A2
DDR_D14: U5.T4 U6.B8 U7.B8
DDR_D15: U5.R6 U6.A3 U7.A3
DDR_DQM0: U5.Y8 U6.E7 U7.E7
DDR_DQM1: U5.W2 U6.D3 U7.D3
DDR_DQS0_N: U5.Y6 U6.G3 U7.G3
DDR_DQS0_P: U5.W6 U6.F3 U7.F3
DDR_DQS1_N: U5.Y3 U6.B7 U7.B7
DDR_DQS1_P: U5.W3 U6.C7 U7.C7
DDR_ODT0: U5.T12 U6.K1
DDR_ODT1: U5.U12 U7.K1
DDR_RAS_B: U5.U9 U6.J3 U7.J3
DDR_RST: U5.Y17 U6.T2 U7.T2
DDR_WE_B: U5.W10 U6.L3 U7.L3
DSI_CKN: J14.16 U5.U18
DSI_CKP: J14.14 U5.U19
DSI_DN0: J14.6 U5.V20
DSI_DN1: J14.10 U5.U20
DSI_DN2: J14.20 U5.T18
DSI_DN3: J14.26 U5.R19
DSI_DP0: J14.4 U5.W19
DSI_DP1: J14.8 U5.V19
DSI_DP2: J14.18 U5.T19
DSI_DP3: J14.24 U5.R20
E2PROM_SCL: R46.1 U5.D5
E2PROM_SDA: R47.1 U5.D6
GPADC0: U5.C13
GPADC1: U5.B13
HBIAS: C80.1 R55.1 U5.E17
HDMI_0N: U5.K19
HDMI_0P: U5.K18
HDMI_1N: U5.J19
HDMI_1P: U5.J18
HDMI_2N: U5.H20
HDMI_2P: U5.H19
HDMI_CEC: D18.1(K) U5.F19
HDMI_CN: U5.L20
HDMI_CP: U5.L19
HDMI_HPD: R68.1 U5.F20
HDMI_SCL: R66.1 R69.2
HDMI_SCL_R: R69.1 U5.G19
HDMI_SDA: R67.1 R70.2
HDMI_SDA_R: R70.1 U5.G18
HP_DET: R58.1 U5.A13
HPLDO: C82.2 U5.D10 U5.E12
HPOUTFB: C83.1 U5.E13
HPOUTL: C84.1 C86.2 U5.B16 U5.F13
HPOUTR: C85.1 C87.2 U5.C16 U5.D13
HUB_3V3_OUT: C100.2 C101.2 C102.2 C103.2 R89.2 R90.2 R91.2 R92.2 R94.2 U14.5 U14.9 U14.14 U14.21 U14.28
HUB_RESET_N: U5.Y18 U14.17
HUB_XTAL1: C98.2 R88.1 U14.10 X2.1
HUB_XTAL2: C99.2 R88.2 U14.11(X2) X2.3(XOUT)
LED_USER1: D3.2 U5.F1
LED_USER2: D4.2 U5.G5
LEDC: U5.F2
LRADC: R122.2 SW4.1 U5.B12
MIC_DET: R56.1 U5.A17
MIC_IN: C78.2 C79.1 R55.2 R56.2
MIC_IN3_C_N: C77.1 U5.D16
MIC_IN3_C_P: C78.1 U5.D17
OTG_5VIN: C97.2 R75.2 R76.1 U13.1(OUT)
OTG_PWRDET: R76.2 R80.1 U5.W18
OTG_PWRDRV: R79.2 U5.M18 U13.4
OVCUR1_N: R89.1 U14.25
OVCUR2_N: R90.1 U14.24
OVCUR3_N: R91.1 U14.20
OVCUR4_N: R92.1 U14.19
PB0: J14.17 U5.J16
PB1: J14.19 U5.J17
PB2: J14.21 U5.M16
PB3: J14.23 U5.M15
PB4: J14.25 U5.K16
PB5: J14.27 U5.K15
PB6: J14.29 U5.K17
PB7: J14.31 U5.J15
PB10: J14.33 U5.F17
PB11: J14.35 U5.F15
PB12: J14.37 U5.F16
PG14: J14.13 U5.E6
PG15: J14.15 U5.F6
PGANG: R94.1 R95.1 U14.23
PSELF: R93.1 U14.22
PWM0: J14.9 U5.N20
PWM1: J14.11 U5.N19
REFCLK_OUT: J5.1 U5.J2
SDC0_CLK: R40.2
SDC0_CMD: R50.2 U5.D1
SDC0_D0: R49.2 U5.C1
SDC0_D1: R48.2 U5.C2
SDC0_D2: R51.2 U5.E2
SDC0_D3: R54.1 U5.E3
SDC0_DET: R41.1 U5.D3
SDC1_CLK: R39.2
SDC1_CMD: R116.2 U5.B3
SDC1_D0: R115.2 U5.A3
SDC1_D1: R114.2 U5.C3
SDC1_D2: R113.2 U5.A4
SDC1_D3: R112.2 U5.B4
SPI1_CLK: J14.32 U5.R17
SPI1_CS: J14.30 U5.T17
SPI1_HOLD: J14.38 U5.N17
SPI1_MISO: J14.36 U5.P18
SPI1_MOSI: J14.34 U5.P19
SPI1_WP: J14.40 U5.N16
TFT_CLK: U5.G3 U11.6
TFT_CS: U5.G2 U11.8
TFT_DI: R45.1 U5.H3 U11.5
TFT_RESET: R44.1 U5.F5 U5.G6 U11.3 U11.4
UART0_RX: R109.2 U5.G16
UART0_TX: R108.2 U5.G15
UART1_CTS: U5.B6
UART1_RTS: U5.A6
UART1_RX: U5.C5
UART1_TX: U5.B5
USB0_DM: U5.C7 U12.4
USB0_DP: U5.B7 U12.3
USB1_DM: R82.1 R85.1 U5.B8
USB1_DP: R81.1 R84.1 U5.A8
USB_C_CC: D25.1(K) U12.2
USB_HUB_DM1: R87.1 U14.3
USB_HUB_DM2: J10.6 U14.6 U19.3
USB_HUB_DM3: J11.2 U14.12 U17.3
USB_HUB_DM4: J11.6 U14.15 U22.3
USB_HUB_DP1: R86.1 U14.4
USB_HUB_DP2: J10.7 U14.7 U19.4
USB_HUB_DP3: J11.3 U14.13 U17.4
USB_HUB_DP4: J11.7 U14.16 U22.4
USB_HUB_R_DM1: J10.2 R85.2 R87.2 U16.3
USB_HUB_R_DP1: J10.3 R84.2 R86.2 U16.4
USB_HUB_RREF: R83.2 U14.8
USB_ID: D25.2 R78.2 U5.V18
USB_UART_DN: U24.3
USB_UART_DP: U24.4
USBD_VBUS1: C105.2 J10.1 R96.2 U16.2 U18.1(OUT)
USBD_VBUS2: C109.2 J10.5(VBUS2) R102.2 U19.2 U20.1(OUT)
USBD_VBUS3: C107.2 J11.1 R97.2 U15.1(OUT) U17.2
USBD_VBUS4: C111.2 J11.5(VBUS2) R103.2 U21.1(OUT) U22.2
VLDO_AOUT: C24.1 R16.1 U5.L7
VLDO_BOUT: C23.1 U5.N7
WIFI_HOST_WAKE: R119.2 U5.C6
WL_REG_ON: R121.2 U5.D4
N05187: R28.1 U5.U17
N05199: C47.1 R31.2 R34.1 U5.U16
N10896: C40.2 C45.1 R29.2 R32.1 U6.H1 U6.M8
N11228: R26.2 U6.L8(ZQ)
N13296: R27.2 U7.L8(ZQ)
N13332: C44.2 C46.1 R30.2 R33.1 U7.H1 U7.M8
N14267: C48.1 R37.2 R38.2
N20531: C19.2 U5.L3 Y1.2
N20543: C18.2 U5.L2 Y1.1
N21129: C20.2 U5.K1 X1.1
N21181: C22.2 U5.K2 X1.3(XOUT)
N29353: R40.1 U5.D2
N41780: C21.1 R25.2 SW2.1 U5.M2
N43929: R24.2 SW1.1 U5.A18
N45306: R23.2 U5.N3
N46840: R39.1 U5.B2
N52116: C2.2 R2.2 R7.1 U1.5
N52730: C7.2 R13.2 R15.1 U2.5
N53240: C11.2 R18.2 R19.1 U3.5
N54369: R17.2 U3.1
N54444: R12.2 U2.1
N54777: C5.1 R4.2 R9.1 U1.1
N66029: C75.2 U5.B19
N66041: C76.2 U5.B18
N68409: R68.2
N68845: D18.2 R71.2
N204760: R98.2 U18.4
N205076: R104.2 U20.4
N205088: R105.2 U21.4
N205970: R81.2 U14.2
N205974: R82.2 U14.1
N407654: C114.2 RF1.1
N407798: C115.2
N407882: L2.1
N407886: C118.2 L2.2
N408186: C119.1 X3.1
N408360: C120.1 X3.3(XOUT)
N409393: C94.1 Q1.3 R72.1
N409401: R72.2 U11.1
N410138: C84.2 R59.1
N410152: C85.2
N410371: R57.2 R58.2
N410613: C86.1 R60.1
N410741: C87.1 R61.1
N417891: R20.2 U4.1
N417895: C15.2 R21.2 R22.1 U4.5
N421423: R111.1
N422391: R42.1
N422395: R43.1
N424938: D28.2
N424942: D28.1(CATHODE) R110.1
N425200: D26.1(CATHODE) R108.1
N425264: D27.1(CATHODE) R109.1
N445250: D2.1(CATHODE) R14.1
N449991: R99.2 U15.4
N460804: R101.1 U15.3
N461293: R107.1 U21.3
N462490: R106.1 U20.3
N462494: R100.1 U18.3
N463506: Q1.1 R73.2
N467220: R123.1 SW4.2
N4530222: R77.1 U13.3
N4695831: D4.1(CATHODE) R53.1
N4699401: D3.1(CATHODE) R52.1

Pads without a net: RF1 2; U5 A11 B9 B11 B14 B15 B17 C9 C11 C12 C14 C15 C17 D9 D15 D19 D20 E9 E10 E15 E16 E18 E19 F10 M6 N2 N6; U6 J1 J9 L1 L9 M7; U7 J1 J9 L1 L9 M7; U14 18 26
